# EAGLE board source_eagle (EAGLE 9.6.2)
REV: A
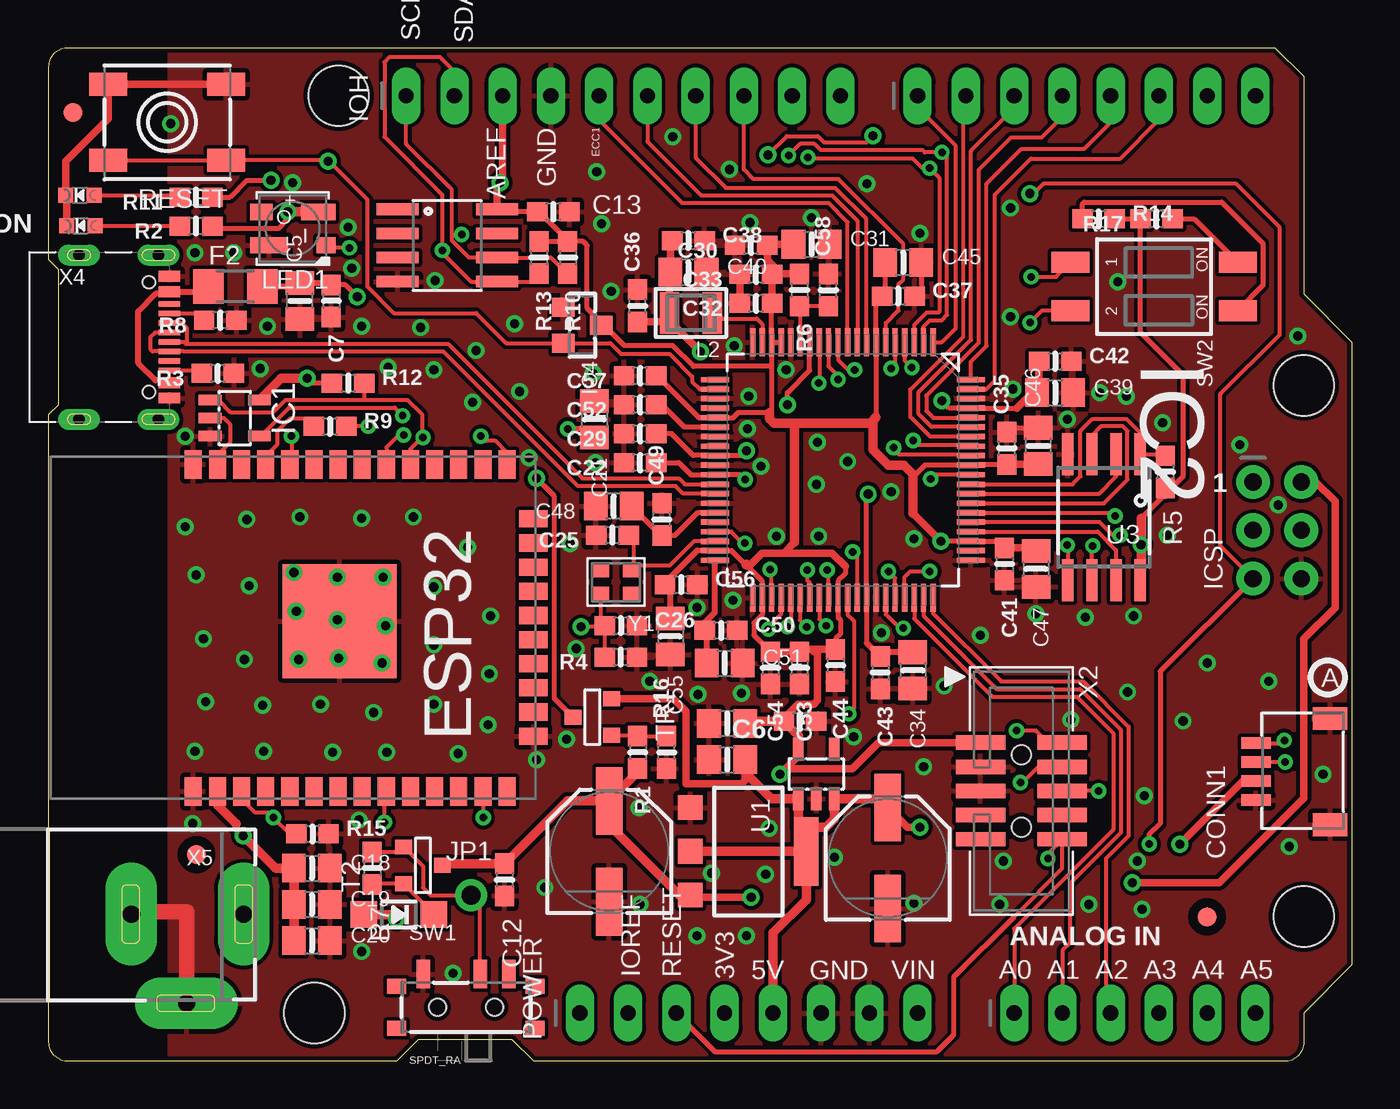
[diagram p0: board, top side]
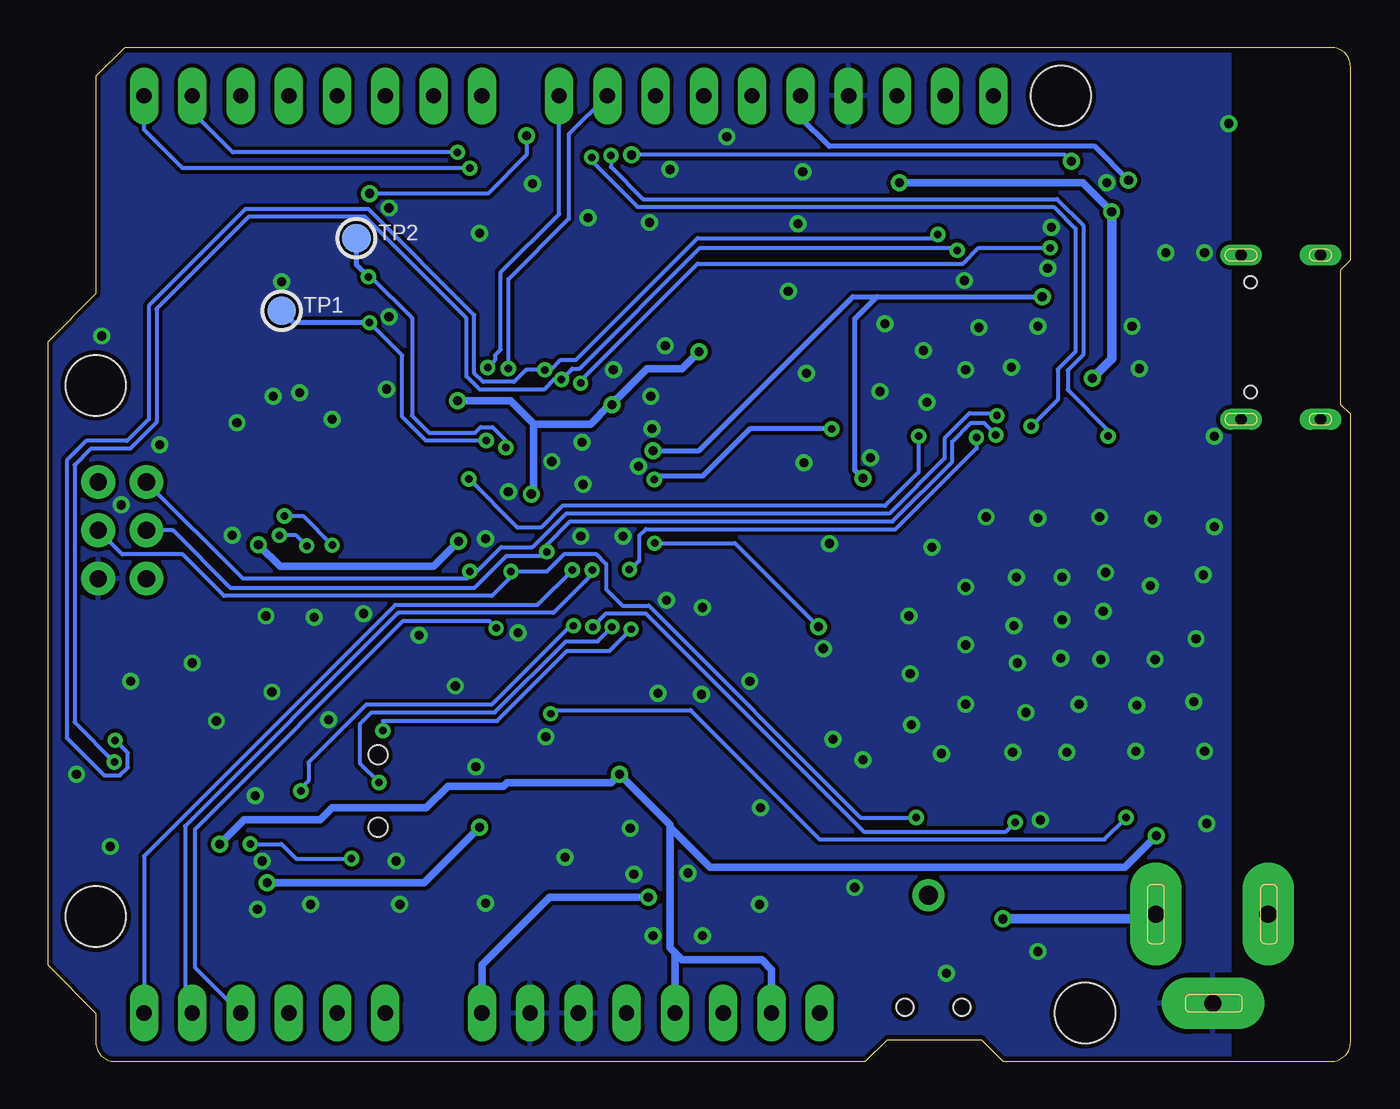
[diagram p1: board, bottom side, seen from below]

Size 68.58 x 53.34 mm. Coordinates in mm from the lower left corner, seen from the top.
Outline: 64.52,53.34 66.04,51.82 66.04,40.39 68.58,37.85 68.58,5.08 66.04,2.54 66.04,1 arc-90 65.04,0 25.53,0 24.38,1.14 19.43,1.14 18.29,0 1,0 arc-90 0,1 0,34.04 0.51,34.54 0.51,41.66 0,42.16 0,52.34 arc-90 1,53.34 64.52,53.34
Copper layers (1*16): Top 0.035mm / dielectric 1.5mm / Bottom 0.035mm
Design rules "adafruit *": minimum track width 8mil, minimum drill 15.5mil, track to track 8mil, track to pad 8mil, pad to pad 8mil, via to via 8mil, smd to smd 8mil, copper to edge 10mil, drill to drill 8mil, minimum pad ring 10mil, minimum via ring 8mil, stop-mask expansion 2mil, vias tented up to drill 20mil, thermal gap 10mil
Net classes: 3 HIGHPOWER: width 0.254 mm, drill 0.483 mm; 4 LOWPOWER: width 0.254 mm
Holes 3.17 mm at 66.04,35.56 66.04,7.62 15.24,50.8 13.97,2.54

## Footprints (pad centres in the part's own frame; a part is rotated, then mirrored left to right if it is on the bottom)
1X06_OVALWAVE = drill 0.8 pad 1.5 long: 1 -6.35,0; 2 -3.81,0; 3 -1.27,0; 4 1.27,0; 5 3.81,0; 6 6.35,0
0805-NO = smd 1.24 x 1.5: 1 -0.95,0; 2 0.95,0
0603-NO = smd 1.075 x 1: 1 -0.85,0; 2 0.85,0
JST_SH4 = smd 0.6 x 1.55: 1 -1.5,2.006; 2 -0.5,2.006; 3 0.5,2.006; 4 1.5,2.006 | smd 1.2 x 1.8: MT1 -2.8,-1.894; MT2 2.8,-1.894
SOD-123 = smd 1.4 x 1.4: A 1.85,0; C -1.85,0
SOIC8 = smd 0.61 x 2.21: 1 -1.905,-2.616; 2 -0.635,-2.616; 3 0.635,-2.616; 4 1.905,-2.616; 5 1.905,2.616; 6 0.635,2.616; 7 -0.635,2.616; 8 -1.905,2.616
R1206 = smd 1.6 x 1.803: 1 -1.422,0; 2 1.422,0
FIDUCIAL_1MM = smd 1 x 1: 1 0,0
SOT23-5L = smd 0.55 x 1.2: 1 -0.95,-1.3; 2 0,-1.3; 3 0.95,-1.3; 4 0.95,1.3; 5 -0.95,1.3
QFP50P1400X1400X160-80N = smd 1.473 x 0.279: 1 -6.731,4.75; 2 -6.731,4.242; 3 -6.731,3.759; 4 -6.731,3.251; 5 -6.731,2.743; 6 -6.731,2.261; 7 -6.731,1.753; 8 -6.731,1.245; 9 -6.731,0.762; 10 -6.731,0.254; 11 -6.731,-0.254; 12 -6.731,-0.762; 13 -6.731,-1.245; 14 -6.731,-1.753; 15 -6.731,-2.261; 16 -6.731,-2.743; 17 -6.731,-3.251; 18 -6.731,-3.759; 19 -6.731,-4.242; 20 -6.731,-4.75; 41 6.731,-4.75; 42 6.731,-4.242; 43 6.731,-3.759; 44 6.731,-3.251; 45 6.731,-2.743; 46 6.731,-2.261; 47 6.731,-1.753; 48 6.731,-1.245; 49 6.731,-0.762; 50 6.731,-0.254; 51 6.731,0.254; 52 6.731,0.762; 53 6.731,1.245; 54 6.731,1.753; 55 6.731,2.261; 56 6.731,2.743; 57 6.731,3.251; 58 6.731,3.759; 59 6.731,4.242; 60 6.731,4.75 | smd 0.279 x 1.473: 21 -4.75,-6.731; 22 -4.242,-6.731; 23 -3.759,-6.731; 24 -3.251,-6.731; 25 -2.743,-6.731; 26 -2.261,-6.731; 27 -1.753,-6.731; 28 -1.245,-6.731; 29 -0.762,-6.731; 30 -0.254,-6.731; 31 0.254,-6.731; 32 0.762,-6.731; 33 1.245,-6.731; 34 1.753,-6.731; 35 2.261,-6.731; 36 2.743,-6.731; 37 3.251,-6.731; 38 3.759,-6.731; 39 4.242,-6.731; 40 4.75,-6.731; 61 4.75,6.731; 62 4.242,6.731; 63 3.759,6.731; 64 3.251,6.731; 65 2.743,6.731; 66 2.261,6.731; 67 1.753,6.731; 68 1.245,6.731; 69 0.762,6.731; 70 0.254,6.731; 71 -0.254,6.731; 72 -0.762,6.731; 73 -1.245,6.731; 74 -1.753,6.731; 75 -2.261,6.731; 76 -2.743,6.731; 77 -3.251,6.731; 78 -3.759,6.731; 79 -4.242,6.731; 80 -4.75,6.731
SOT23-WIDE = smd 1 x 1.2: 1 -0.95,-1; 2 0.95,-1; 3 0,1
2X03_ROUND_70MIL = drill 0.9 pad 1.778: 1 -2.54,-1.27; 2 -2.54,1.27; 3 0,-1.27; 4 0,1.27; 5 2.54,-1.27; 6 2.54,1.27
1X10_OVALWAVE = drill 0.8 pad 1.5 long: 1 -11.43,0; 2 -8.89,0; 3 -6.35,0; 4 -3.81,0; 5 -1.27,0; 6 1.27,0; 7 3.81,0; 8 6.35,0; 9 8.89,0; 10 11.43,0
1X08_OVALWAVE = drill 0.8 pad 1.5 long: 1 -8.89,0; 2 -6.35,0; 3 -3.81,0; 4 -1.27,0; 5 1.27,0; 6 3.81,0; 7 6.35,0; 8 8.89,0
1X01_ROUND = drill 1 pad 1.676: 1 0,0
CHIPLED_0603_NOOUTLINE = smd 0.8 x 0.8: A 0,-0.75; C 0,0.75
INDUCTOR_1007 = smd 1.016 x 2.2: P$1 -1.127,0; P$2 1.127,0
LED3535_FULLPADS = smd 1 x 0.85: 1 -1.75,0.875 | smd 1.8 x 0.85: 2 -1.35,-0.875 | smd 1.2 x 0.85: 3 1.65,-0.875 | smd 2 x 0.85: 4 1.25,0.875
PANASONIC_D = smd 3.556 x 1.4: + 2.654,0; - -2.654,0
EVQ-Q2_SMALLER = smd 2 x 1.2: A -3.1,-2; A' 3.1,-2; B -3.1,2; B' 3.1,2
SPDT_SMT_SSSS811101 = smd 0.7 x 1.5: A -2.25,1.242; B 0.75,1.242; C 2.25,1.242 | smd 1 x 0.8: SUP1 -3.65,0.592; SUP2 -3.65,-1.608; SUP3 3.65,0.592; SUP4 3.65,-1.608 | hole 0.9: -1.5,-0.508; 1.5,-0.508
DIPSWITCH_2PIN = smd 1.1 x 2: 1OFF -1.27,-4.4; 1ON -1.27,4.4; 2OFF 1.27,-4.4; 2ON 1.27,4.4
SOT-23 = smd 0.787 x 0.889: 1 0.025,-1.016; 2 -0.94,1.016; 3 0.991,1.016
TESTPOINT_ROUND_1.5MM = smd 1.5 x 1.5: P$1 0,0
SOT223-R = smd 1.3 x 1.3: 1 -2.3,-3.05; 2 0,-3.05; 3 2.3,-3.05 | smd 3.6 x 1.3: 4 0,3.05
SOT23-DBV = smd 0.55 x 1.2: 1 -0.95,-1.3; 2 0,-1.3; 3 0.95,-1.3; 4 0.95,1.3; 5 -0.95,1.3
SOIC8_208MIL = smd 0.6 x 2.2: 1 -1.905,-3.315; 2 -0.635,-3.315; 3 0.635,-3.315; 4 1.905,-3.315; 5 1.905,3.315; 6 0.635,3.315; 7 -0.635,3.315; 8 -1.905,3.315
2X05_1.27MM_BOX_POSTS = smd 0.76 x 2.6: 1 -2.54,-2.15; 2 -2.54,2.15; 3 -1.27,-2.15; 4 -1.27,2.15; 5 0,-2.15; 6 0,2.15; 7 1.27,-2.15; 8 1.27,2.15; 9 2.54,-2.15; 10 2.54,2.15 | hole 1: -1.905,0; 1.905,0
USB_C_CUSB31-CFM2AX-01-X = smd 0.575 x 1.15: A1B12 -3.2,2.275; A4B9 -2.4,2.275; B1A12 3.2,2.275; B4A9 2.4,2.275 | smd 0.275 x 1.15: A5 -1.25,2.275; A6 -0.25,2.275; A7 0.25,2.275; A8 1.25,2.275; B5 1.75,2.275; B6 0.75,2.275; B7 -0.75,2.275; B8 -1.75,2.275 | drill 0.6 pad 1 long: M1 -4.32,1.7; M2 4.32,1.7; M3 -4.32,-2.48; M4 4.32,-2.48 | hole 0.65: 2.89,1.2; -2.89,1.2
DCJACK_2MM_PTH = drill 0.9 pad 2.7 long: GND -2.9,2.54; GNDBREAK 0,-2.16; PWR 3,2.54
WROOM32 = smd 0.9 x 1.5: 1 -9.064,-8.6; 2 -7.794,-8.6; 3 -6.524,-8.6; 4 -5.254,-8.6; 5 -3.984,-8.6; 6 -2.714,-8.6; 7 -1.444,-8.6; 8 -0.174,-8.6; 9 1.096,-8.6; 10 2.366,-8.6; 11 3.636,-8.6; 12 4.906,-8.6; 13 6.176,-8.6; 14 7.446,-8.6; 25 7.446,8.6; 26 6.176,8.6; 27 4.906,8.6; 28 3.636,8.6; 29 2.366,8.6; 30 1.096,8.6; 31 -0.174,8.6; 32 -1.444,8.6; 33 -2.714,8.6; 34 -3.984,8.6; 35 -5.254,8.6; 36 -6.524,8.6; 37 -7.794,8.6; 38 -9.064,8.6 | smd 1.5 x 0.9: 15 8.836,-5.7; 16 8.836,-4.43; 17 8.836,-3.16; 18 8.836,-1.89; 19 8.836,-0.62; 20 8.836,0.65; 21 8.836,1.92; 22 8.836,3.19; 23 8.836,4.46; 24 8.836,5.73 | smd 6 x 6: P$1 -1.364,0.34
CRYSTAL_2.5X2 = smd 0.9 x 0.75: 1 -0.825,-0.625; 2 0.825,-0.625; 3 0.825,0.625; 4 -0.825,0.625

## Placement (x,y rotation side)
AD  1x6F  [1X06_OVALWAVE]  57.15,2.54 0 top
C2  10uF  [0805-NO]  35.69,15.88 0 top
C3  10uF  [0805-NO]  35.69,17.78 0 top
C5  10uF  [0805-NO]  13.21,40.01 90 top
C6  0.1uF  [0603-NO]  39.53,17.88 180 top
C7  0.1uF  [0603-NO]  14.86,40.01 270 top
C12  0.1uF  [0603-NO]  23.98,9.55 270 top
C13  0.1uF  [0603-NO]  26.54,44.7 0 top
C18  10uF  [0805-NO]  13.84,10.16 0 top
C19  10uF  [0805-NO]  13.84,8.26 0 top
C20  10uF  [0805-NO]  13.84,6.35 0 top
C21  10uF  [0805-NO]  28.7,33.78 270 top
C22  0.1uF  [0603-NO]  31.11,31.5 180 top
C25  16pF  [0603-NO]  29.65,27.69 180 top
C26  16pF  [0603-NO]  30.1,22.92 0 top
C29  1uF  [0603-NO]  31.11,33.02 180 top
C30  1uF  [0603-NO]  36.96,42.93 180 top
C31  10uF  [0805-NO]  40.13,42.99 0 top
C32  0.1uF  [0603-NO]  37.21,39.88 180 top
C33  0.22uF  [0603-NO]  37.21,41.4 180 top
C34  22uF  [0805-NO]  45.47,20.57 270 top
C35  0.1uF  [0603-NO]  50.42,32.26 90 top
C36  1uF  [0603-NO]  30.99,39.75 90 top
C37  0.1uF  [0603-NO]  44.7,40.26 0 top
C38  0.22uF  [0603-NO]  33.66,43.18 0 top
C39  10uF  [0805-NO]  52.96,35.18 0 top
C40  10uF  [0805-NO]  33.66,41.53 0 top
C41  0.1uF  [0603-NO]  50.29,26.16 270 top
C42  1uF  [0603-NO]  52.96,36.83 0 top
C43  0.1uF  [0603-NO]  43.75,20.45 270 top
C44  1uF  [0603-NO]  41.4,20.83 270 top
C45  10uF  [0805-NO]  44.96,42.04 0 top
C46  10uF  [0805-NO]  52.07,32.38 90 top
C47  10uF  [0805-NO]  51.94,25.91 270 top
C48  10uF  [0805-NO]  29.72,29.21 180 top
C49  0.22uF  [0603-NO]  32.26,28.51 90 top
C50  0.22uF  [0603-NO]  35.37,22.67 0 top
C51  10uF  [0805-NO]  35.56,20.95 0 top
C52  0.22uF  [0603-NO]  31.11,34.54 180 top
C53  0.22uF  [0603-NO]  39.5,20.7 270 top
C54  1uF  [0603-NO]  37.97,20.7 270 top
C55  10uF  [0805-NO]  32.7,22.35 270 top
C56  0.22uF  [0603-NO]  33.27,25.08 0 top
C57  0.22uF  [0603-NO]  31.11,36.07 180 top
C58  0.22uF  [0603-NO]  41.02,40.58 90 top
CONN1  STEMMA_I2C_QT  [JST_SH4]  65.53,15.24 90 top
D1  MBR120  [SOD-123]  18.41,7.72 180 top
ECC1  ATECC108  [SOIC8]  20.95,42.93 270 top
F2  FUSE  [R1206]  9.8,40.77 0 top
FD1  FIDUCIAL_1MM  [FIDUCIAL_1MM]  1.27,49.91 0 top
FD2  FIDUCIAL_1MM  [FIDUCIAL_1MM]  60.95,7.6 0 top
FD3  FIDUCIAL_1MM  [FIDUCIAL_1MM]  7.77,10.88 0 top
IC1  74AHC1G125  [SOT23-5L]  9.78,33.85 270 top
IC2  IMX_RT1010  [QFP50P1400X1400X160-80N]  41.78,31.11 270 top
IC4  RESET_SUPERVISORAPX80X_SA  [SOT23-WIDE]  28.07,38.73 270 top
ICSP  2x3M  [2X03_ROUND_70MIL]  64.64,27.94 270 top
IOH  1x10F  [1X10_OVALWAVE]  30.23,50.8 0 top
IOL  1x8F  [1X08_OVALWAVE]  54.61,50.8 0 top
JP1  [1X01_ROUND]  22.23,8.74 0 top
L  RED  [CHIPLED_0603_NOOUTLINE]  1.63,45.57 90 top
L2  4.7uH  [INDUCTOR_1007]  33.78,39.37 180 top
LED1  WS2812B_3535FULL  [LED3535_FULLPADS]  12.83,43.81 180 top
ON  GREEN  [CHIPLED_0603_NOOUTLINE]  1.68,43.97 90 top
PC1  47uF/25V  [PANASONIC_D]  29.49,11.05 90 top
PC2  47uF/25V  [PANASONIC_D]  44.15,10.69 90 top
POWER  1x8F  [1X08_OVALWAVE]  36.83,2.54 0 top
R1  100K  [0603-NO]  30.99,16.26 270 top
R2  5.1K  [0603-NO]  7.75,43.94 180 top
R3  5.1K  [0603-NO]  8.89,36.2 180 top
R4  2.2M  [0603-NO]  30.1,21.27 180 top
R5  10K  [0603-NO]  58.75,31.01 270 top
R6  30K  [0603-NO]  39.5,40.58 270 top
R7  10K  [0603-NO]  17.02,10.16 270 top
R8  5.1K  [0603-NO]  9.02,38.99 180 top
R9  10K  [0603-NO]  14.8,33.4 0 top
R10  10K  [0603-NO]  27.3,42.29 270 top
R11  5.1K  [0603-NO]  7.75,45.47 180 top
R12  10K  [0603-NO]  15.75,35.69 0 top
R13  10K  [0603-NO]  25.78,42.29 270 top
R14  5.1K  [0603-NO]  55.24,44.32 0 top
R15  10K  [0603-NO]  13.87,11.96 0 top
R16  100K  [0603-NO]  32.51,16.26 90 top
R17  5.1K  [0603-NO]  58.29,44.32 180 top
RESET  6x6mm  [EVQ-Q2_SMALLER]  6.22,49.4 180 top
SW1  SPDT_RA  [SPDT_SMT_SSSS811101]  21.95,3.35 0 top
SW2  DIP2  [DIPSWITCH_2PIN]  58.17,40.77 270 top
T2  DMP3098L-7  [SOT-23]  19.68,10.29 90 top
TP1  [TESTPOINT_ROUND_1.5MM]  56.26,39.5 0 bottom
TP2  [TESTPOINT_ROUND_1.5MM]  52.32,43.31 0 bottom
TR1  DMP3098L-7  [SOT-23]  28.6,18.14 270 top
U1  NCP1117ST50T3G  [SOT223-R]  36.8,11.05 270 top
U2  AP2112K-3.3  [SOT23-DBV]  40.39,15.11 0 top
U3  W25Q64JV  [SOIC8_208MIL]  55.52,28.63 180 top
U$11  [PCBFEAT-REV-040]  67.31,20.19 0 top
U$12  [METROM7_RT1011AIR_BOT]  68.58,0 0 bottom
U$18  [METROM7_RT1011AIR_TOP]  0,0 0 top
X2  2x5 0.05" SWD  [2X05_1.27MM_BOX_POSTS]  51.18,14.22 270 top
X4  USB C  [USB_C_CUSB31-CFM2AX-01-X]  4.06,38.1 270 top
X5  2.1mm  [DCJACK_2MM_PTH]  7.24,5.21 0 top
X6  ESP32_WROOM32  [WROOM32]  16.66,22.81 0 top
Y1  24MHz 10pF  [CRYSTAL_2.5X2]  29.84,25.21 180 top

## Library data of the parts
AD ICSP IOH IOL POWER = microbuilder; FORCETHM: 1
C2 C3 C5-C7 C12 C13 C18-C22 C25 C26 C29-C58 D1 JP1 L2 LED1 R1-R17 TP1 TP2 U3 Y1 = microbuilder
CONN1 = adafruit_electromech; LCSC: C2845363
ECC1 = cryptotronix
F2 = adafruit
FD1-FD3 = microbuilder; BOM: EXCLUDE
IC1 = adafruit; ROT: 270
IC2 = adafruit_micro; ROT: 270
IC4 = adafruit_power; ROT: 270
L ON U1 = microbuilder; ROT: 270
PC1 PC2 = microbuilder; ROT: 180
RESET SW1 SW2 X2 = adafruit_electromech
T2 = zetex; OC_FARNELL: unknown; OC_NEWARK: unknown; ROT: 90
TR1 = Transistors; CASE: SOT23; MONTHLY_USAGE: _____; PART_NUMBER: PMV48XP; PRICE: _____; ROT: 90; SUPPLIER: _____; TYPE: Transistor
U2 = SmartPrj
U$11 = microbuilder; REV: A
U$12 U$18 = metro_silks
X4 = adafruit_electromech; LCSC: C165948
X5 = adafruit_electromech; FORCETHM: 1
X6 = adafruit_wireless

## Nets
3.3V [HIGHPOWER]: C3.2 C6.2 C13.1 C18.1 C19.1 C20.1 C30.1 C31.1 C32.1 C33.1 C35.1 C37.1 C41.1 C44.1 C45.1 C46.1 C47.1 C53.1 C54.1 C55.1 C56.1 C57.1 CONN1.2 ECC1.8 IC1.5 IC2.7 IC2.17 IC2.18 IC2.25 IC2.39 IC2.42 IC2.50 IC2.63 IC2.71 IC4.3 IOH.3 LED1.2 POWER.2 POWER.4 R2.1 R5.2 R6.1 R10.1 R12.1 R13.1 R14.2 R17.2 U2.5 U3.8 X2.1 X6.2
!RESET: IC2.22 IC4.2 ICSP.5 POWER.3 RESET.B RESET.B' X2.10
+5V [HIGHPOWER]: C2.2 ICSP.2 PC2.+ POWER.5 TR1.2 U1.2 U1.4 U2.1 U2.3
A0: AD.1 IC2.58
A1: AD.2 IC2.59
A2: AD.3 IC2.60
A3: AD.4 IC2.55
A4: AD.5 IC2.47
A5: AD.6 IC2.49
BOOT_MODE0: IC2.72 SW2.1OFF TP2.P$1
BOOT_MODE1: IC2.73 SW2.2OFF TP1.P$1
D2: IC2.79 IOL.6
D3: IC2.80 IOL.5
D4: IC2.76 IOL.4
D5: IC2.75 IOL.3
D6: IC2.74 IOL.2
D7: IC2.1 IOL.1
D8: IC2.4 IOH.10
D9: IC2.5 IOH.9
D10: IC2.6 IOH.8
D11: IC2.8 IOH.7
D12: IC2.9 IOH.6
D13: IC2.10 IOH.5 R11.1
D+: IC2.33 X4.A6 X4.B6
D-: IC2.32 X4.A7 X4.B7
DCDC: IC2.19 L2.P$1
ESP_BUSY: IC2.46 X6.9
ESP_CS: IC1.1 IC2.43 R12.2 X6.29
ESP_GPIO0: IC2.70 X6.25
ESP_MISO: IC1.2 X6.37
ESP_RESET: IC2.51 R15.1 X6.3
ESP_TX: R9.1 X6.35
FLASH_CS: IC2.69 R5.1 U3.1
FLASH_IO0: IC2.66 U3.5
FLASH_IO1: IC2.68 U3.2
FLASH_IO2: IC2.67 U3.3
FLASH_IO3: IC2.64 U3.7
FLASH_SCK: IC2.65 U3.6
GND: C2.1 C3.1 C5.1 C6.1 C7.2 C12.2 C13.2 C18.2 C19.2 C20.2 C21.1 C22.2 C25.2 C26.2 C29.2 C30.2 C31.2 C32.2 C33.2 C34.2 C35.2 C36.2 C37.2 C38.2 C39.2 C40.2 C41.2 C42.2 C43.2 C44.2 C45.2 C46.2 C47.2 C48.2 C49.2 C50.2 C51.2 C52.2 C53.2 C54.2 C55.2 C56.2 C57.2 C58.2 CONN1.1 CONN1.MT1 CONN1.MT2 ECC1.4 IC1.3 IC2.16 IC2.20 IC2.23 IC2.27 IC2.30 IC2.34 IC2.41 IC2.54 IC2.61 IC2.78 IC4.1 ICSP.6 IOH.4 L.C LED1.4 ON.C PC1.- PC2.- POWER.6 POWER.7 R3.1 R4.1 R8.1 R15.2 R16.1 RESET.A RESET.A' SW1.A U1.1 U2.2 U3.4 X2.3 X2.5 X4.A1B12 X4.B1A12 X5.GND X5.GNDBREAK X6.1 X6.15 X6.38 X6.P$1
MISO: IC1.4 IC2.57 ICSP.1
MOSI: IC2.56 ICSP.4 X6.13
N$1: L.A R11.2
N$2: ON.A R2.2
N$3: R14.1 SW2.2ON
N$4: R17.1 SW2.1ON
N$6: R8.2 X4.A5
N$8: R3.2 X4.B5
N$9: C26.1 IC2.37 R4.2 Y1.3
N$10: C25.1 IC2.38 Y1.1
N$11: R1.1 R16.2 TR1.3
N$15: D1.C R7.2 T2.2
NEOPIX: IC2.13 LED1.1
PSW: C58.1 IC2.15 R6.2
PWR_SWITCH: JP1.1 R7.1 SW1.B T2.3
PWRIN [HIGHPOWER]: D1.A X5.PWR
RXD: IC2.3 IOL.8 R9.2
SCK: IC2.52 ICSP.3 X6.30
SCL: CONN1.4 ECC1.6 IC2.11 IOH.1 R10.2
SDA: CONN1.3 ECC1.5 IC2.12 IOH.2 R13.2
SVCS_CAP [LOWPOWER]: C52.1 IC2.26
SWCLK: IC2.45 X2.4
SWDIO: IC2.44 X2.2
SWO: IC2.48 X2.6
TXD: IC2.2 IOL.7 X6.34
USB_CAP [LOWPOWER]: C21.2 C22.1 IC2.31
VBUS [HIGHPOWER]: C5.2 C7.1 C29.1 F2.2 IC2.29 TR1.1
VBUS_UNFUSE [HIGHPOWER]: F2.1 X4.A4B9 X4.B4A9
VDD_SOC_IN [HIGHPOWER]: C34.1 C36.1 C38.1 C39.1 C40.1 C42.1 C43.1 IC2.14 IC2.53 IC2.77 L2.P$2
VDDA_1P1_CAP [LOWPOWER]: C50.1 C51.1 IC2.40
VDDA_2P5_CAP [LOWPOWER]: C48.1 C49.1 IC2.35
VIN [HIGHPOWER]: C12.1 PC1.+ POWER.8 R1.2 T2.1 U1.3

## Tracks (layer width: path | path; a pad name or v marks a point on that pad's centre or on a via)
3.3V  (via drill 0.48)
  Top 0.254: C35.1 48.55,31.41 IC2.71 46.1,31.37 45.47,30.73 45.47,29.97 | 52.04,31.41 C46.1 | 49.95,27.36 IC2.63 v46.94,27.36 | IC2.18 IC2.17 | IC2.18 38.02,39.84 | 38.02,36.56 38.02,34.21 37.92,34.11 36.26,34.11 36.01,33.86 IC2.25 34.21,33.86 32,36.07 C57.1 | 43.54,33.88 IC2.7 43.54,40.23 43.56,40.26 C37.1 44.01,40.41 C45.1 | C44.1 41.4,22.23 41.66,22.48 41.66,23.24 41.53,23.37 IC2.50 41.53,25.27 41.91,25.65 41.91,26.04 | C54.1 37.1,22.43 37.1,23.05 37.54,23.5 IC2.42 37.54,25.26 36.67,26.13 | 36.64,26.16 35.93,26.87 IC2.39 34.11,26.87 | ECC1.8 23.7,44.7 C13.1 25.78,44.7 27.32,43.16 R10.1 | 38.02,36.56 33.92,36.56 32.83,37.66 30.29,37.66 29.21,38.73 | 29.21,38.73 28.32,39.62 28.32,42.93 28.11,43.14 R10.1 | IC2.18 38.02,36.56 | 57.48,28.57 58.75,29.84 59.69,30.79 59.69,36.11 57.44,38.35 R17.2 R14.2 | v12.57,44.7 12.57,44.32 12.06,43.81 8.72,43.81 R2.1 | R12.1 13.84,35.69 v13.59,35.94 | R13.1 R10.1 | IC4.3 29.21,38.73
  Top 0.305: 34.11,26.87 32.42,25.18 C56.1 32.7,24.8 C55.1
  Top 0.406: C35.1 52.04,31.41 | 49.95,27.36 C41.1 51.79,27.01 C47.1 | 38.02,39.84 C32.1 C33.1 38.06,41.91 | R6.1 38.54,41.43 38.06,41.91 | 38.06,41.91 37.81,42.16 C30.1 37.87,42.99 C31.1 | v46.94,27.36 45.47,28.83 | C54.1 C53.1 39.62,21.68 40.13,21.68 | 40.13,21.68 C44.1 | 36.64,26.16 36.67,26.19 36.7,26.16 36.83,26.04 37.53,26.73 38.67,26.73 | 38.67,26.73 41.21,26.73 41.91,26.04 | 40.13,21.68 40.26,21.55 40.45,21.55 40.45,18.99 40.25,18.79 39.42,18.79 38.68,18.05 C6.2 | U2.5 39.44,16.07 v38.48,15.11 38.77,15.41 42.29,15.41 43.65,16.76 X2.1 | v10.22,11.87 9.84,12.26 9.84,12.51 | ECC1.8 23.57,46.05 v23.75,46.23 23.88,46.35 IOH.3 | 39.24,27.3 38.67,26.73 | CONN1.2 62.82,14.74 v59.51,11.43
  Top 0.508: R5.2 58.75,29.84 | 57.48,28.57 v57.48,27.18 57.48,26.11 57.43,26.06 U3.8 | 43.36,33.58 39.24,33.58 | 39.24,33.58 38.15,33.58 37.92,33.81 37.92,34.11 | 43.54,33.88 43.36,33.71 43.36,33.58 | 45.47,28.83 45.47,29.97 45.47,30.89 45,31.36 44.18,31.36 43.36,32.18 43.36,33.58 | 36.67,26.13 36.7,26.16 | X6.2 8.87,13.48 9.84,12.51 | v10.22,11.87 11.94,10.16 C18.1 C19.1 C20.1 | C3.2 36.74,17.88 C6.2 39.44,17.13 U2.5 | LED1.2 12.59,44.69 v12.57,44.7 | v13.59,35.94 12.22,35.94 IC1.5 | 39.24,33.58 39.24,27.3
  Bottom 0.406: 35.81,12.32 33.72,10.22 11.87,10.22 v10.22,11.87 | 35.81,12.32 35.81,12.45 v38.48,15.11 38.92,14.67 44.39,14.67 44.58,14.48 47.5,14.48 48.64,13.34 53.59,13.34 54.23,12.7 58.24,12.7 v59.51,11.43 | 35.81,12.32 35.81,5.97 35.56,5.71 | 35.56,5.71 POWER.4 | 35.56,5.71 35.18,5.33 30.99,5.33 30.48,4.83 POWER.2 | v23.75,46.23 14.1,46.23 v12.57,44.7 | v57.48,27.18 56.34,26.04 48.26,26.04 v46.94,27.36
  Bottom 0.508: v12.57,44.7 12.57,36.96 v13.59,35.94
!RESET  (via drill 0.39, 0.48)
  Top 0.203: 14.7,47.4 RESET.B RESET.B' | 14.7,47.4 16.76,45.34 16.76,40.76 18.15,39.37 22.48,39.37 24.06,37.78 IC4.2 29.55,37.78 30.11,37.22 32.65,37.22 33.85,36.03 33.85,35.76 34.25,35.36 IC2.22 | 50.8,7.62 53.33,10.15 X2.10 52.58,10.93 v52.58,10.67 | 14.7,47.4 v14.7,47.36 | ICSP.5 61.66,27.11 61.66,35.12 64.77,38.23 64.77,43.88 62.48,46.16 52.32,46.16 51.72,45.56 | v37.85,47.69 38.83,48.67 40.47,48.67 40.79,48.35 43.03,48.35 v43.37,48.69
  Top 0.254: ICSP.5 58.48,20.51 58.48,12.51 57.91,11.94 v57.91,11.43 | POWER.3 35.05,0.51 46.74,0.51 47.62,1.4 47.62,4.45 50.8,7.62 | 51.72,45.56 v51.63,45.66
  Bottom 0.203: v57.91,11.43 56.26,11.43 55.5,10.67 v52.58,10.67 | v14.7,47.36 15.03,47.69 v37.85,47.69 | v51.63,45.66 45.4,45.66 43.37,47.69 v43.37,48.69
+5V  (via drill 0.48)
  Top 0.406: TR1.2 32.87,19.07 33.53,18.41 33.53,14.61 36.45,14.61 36.64,14.79 C2.2 | ICSP.2 66.67,30.48 67.69,29.46 67.69,23.88 66.04,22.23 66.04,13.84 61.59,9.4 v57.02,9.4 | v45.85,12.32 45.17,12.32 PC2.+
  Top 0.508: C2.2 36.64,15.21 38.04,13.81 U2.1 39.44,12.32 39.82,12.32 | 39.82,12.32 39.82,11.09 U1.4 | 39.82,12.32 40.89,12.32 41.34,12.76 U2.3 43.68,13.81 PC2.+ | U1.2 U1.4 | POWER.5 38.1,6.75 39.85,8.51 U1.4
  Bottom 0.406: v57.02,9.4 48.77,9.4 v45.85,12.32
A0
  Top 0.203: IC2.58 45.54,23.29 49.66,19.18 54.1,19.18 56.01,17.27 56.01,12.19 50.8,6.99 AD.1
A1
  Top 0.203: IC2.59 46.02,23.44 49.89,19.58 54.27,19.58 56.41,17.44 56.41,12.02 53.72,9.33 53.72,6.22 53.34,5.84 AD.2
A2
  Top 0.203: AD.3 55.63,2.79 55.63,10.66 56.82,11.86 56.82,17.61 54.44,19.99 50.12,19.99 46.53,23.57 IC2.60
A3  (via drill 0.39)
  Top 0.203: IC2.55 44.04,23.52 44.87,22.7 v44.96,22.79
  Bottom 0.203: v44.96,22.79 45.34,23.17 49.85,23.17 60.83,12.19 60.83,4.95 AD.4
A4  (via drill 0.39)
  Top 0.203: IC2.47 40.03,25.18 39.92,25.3 v39.92,25.85
  Bottom 0.203: v39.92,25.85 39.92,25.64 41.96,23.6 50.12,23.6 61.34,12.38 61.34,2.92 AD.5
A5  (via drill 0.39)
  Top 0.203: IC2.49 41.02,25.78 v40.96,25.85
  Bottom 0.203: v40.96,25.85 42.8,24 50.29,24 63.5,10.79 AD.6
BOOT_MODE0  (via drill 0.39)
  Top 0.203: IC2.72 48.48,31.91 44.73,31.91 44.46,32.18 v44.46,32.29 | SW2.1OFF 53,41.27 v51.69,41.27
  Bottom 0.203: v44.46,32.29 44.46,32.67 45.16,33.37 45.78,33.37 46.08,33.07 48.49,33.07 49.4,33.98 49.4,39.12 51.56,41.27 v51.69,41.27
  Bottom 0.254: v51.69,41.27 52.32,41.91 TP2.P$1
BOOT_MODE1  (via drill 0.39)
  Top 0.203: IC2.73 48.45,32.42 45.62,32.42 45.49,32.55 v45.49,32.66 | v51.63,38.86 52.27,39.5 SW2.2OFF
  Bottom 0.203: v45.49,32.66 48.66,32.66 49.91,33.91 49.91,37.14 v51.63,38.86
  Bottom 0.254: v51.63,38.86 55.63,38.86 TP1.P$1
D2
  Top 0.203: IC2.79 49.33,35.36 49.78,35.81 49.78,45.59 51.69,47.5 56.39,47.5 58.42,49.53 IOL.6
D3
  Top 0.203: IC2.80 48.51,36.8 49.35,37.63 49.35,46.17 51.18,48.01 54.48,48.01 55.88,49.4 IOL.5
D4
  Top 0.203: IC2.76 46.54,33.86 46.17,34.23 46.17,35.02 48.94,37.8 48.94,46.91 50.65,48.61 52.25,48.61 53.34,49.7 IOL.4
D5
  Top 0.203: IC2.75 46.45,33.38 45.76,34.06 45.76,35.19 48.53,37.96 48.53,47.9 50.8,50.16 IOL.3
D6
  Top 0.203: IC2.74 46.38,32.87 45.34,33.91 45.34,35.34 48.13,38.13 48.13,50.67 IOL.2
D7
  Top 0.203: IC2.1 46.99,37.85 47.72,38.58 47.72,48.16 45.59,50.29 45.59,50.67 IOL.1
D8  (via drill 0.39)
  Top 0.203: IC2.4 45.03,36.88 v45.41,36.5
  Bottom 0.203: v45.41,36.5 45.03,36.89 45.03,37.14 44.73,37.44 44.73,41.5 41.66,44.58 IOH.10
D9  (via drill 0.39)
  Top 0.203: IC2.5 44.53,36.65 v44.32,36.45
  Bottom 0.203: v44.32,36.45 44.32,41.15 41.15,44.32 41.15,48.77 IOH.9
D10
  Top 0.203: IC2.6 44.04,38.84 44.71,39.51 44.71,40.88 44.96,41.13 44.96,43.02 41.55,46.42 37.08,46.42 36.58,46.93 IOH.8
D11
  Top 0.203: IOH.7 34.04,47.55 35.62,45.96 41.38,45.96 42.99,44.35 42.99,37.88 IC2.8
D12
  Top 0.203: IOH.6 31.5,48.39 34.33,45.55 41.21,45.55 42.55,44.22 IC2.9
D13  (via drill 0.48)
  Top 0.203: IOH.5 28.96,49.53 33.34,45.15 41.04,45.15 42.04,44.15 IC2.10
  Top 0.254: R11.1 9.53,45.47 10.41,46.35 v11.68,46.35
  Bottom 0.254: v11.68,46.35 13.46,48.13 27.43,48.13 28.96,49.66 IOH.5
D+
  Top 0.203: IC2.33 33.38,29.87 32.98,30.27 27.84,30.27 20.77,37.34 7.11,37.34 7.1,37.35 X4.B6 5.45,37.35 5.33,37.47 5.33,38.1 5.58,38.34 X4.A6
D-
  Top 0.203: 7.24,37.74 7.21,37.74 7.1,37.85 X4.A7 | 7.24,37.74 21,37.74 28.07,30.67 33.15,30.67 33.47,30.35 IC2.32 | X4.B7 7,38.85 7.24,38.61 7.24,37.74
DCDC
  Top 0.203: IC2.19 37.54,38.79 37.25,39.07 35.44,39.07 35.15,39.37 L2.P$1
ESP_BUSY  (via drill 0.39)
  Top 0.203: IC2.46 39.52,23.22 v39.88,22.86 | v17.65,12.57 17.65,14.21 X6.9
  Bottom 0.203: v39.88,22.86 39.17,23.57 37.09,23.57 25.62,12.09 18.14,12.09 v17.65,12.57
ESP_CS  (via drill 0.39)
  Top 0.203: X6.29 19.03,32.22 19.5,32.69 19.55,32.69 v19.69,32.83 19.62,32.89 19.62,34.03 18.86,34.8 16.51,34.8 | 16.51,34.8 12.45,34.8 11.8,34.15 9.54,34.15 8.89,34.8 IC1.1 | R12.2 16.6,34.89 16.51,34.8 | IC2.43 38.02,25.81 v37.95,25.88
  Bottom 0.203: v37.95,25.88 37.89,25.88 37.45,26.33 37.45,27.64 37.08,28 23.94,28 19.69,32.25 v19.69,32.83
ESP_GPIO0  (via drill 0.39)
  Top 0.203: IC2.70 46.63,30.86 v46.4,30.64 | X6.25 24.11,32.03 23.5,32.64 22.99,32.64 v22.73,32.89
  Bottom 0.203: v22.73,32.89 22.73,30.99 24.5,29.22 41.47,29.22 42.62,28.08 43.84,28.08 v46.4,30.64
ESP_MISO
  Top 0.203: IC1.2 9.21,33.85 9.53,33.53 9.53,32.56 8.87,31.9 X6.37
ESP_RESET  (via drill 0.39)
  Top 0.203: R15.1 12.68,11.96 v11.81,12.83 11.56,13.08 10.86,13.08 10.14,13.8 X6.3 | IC2.51 42.04,23.5 42.35,23.18 42.35,18.54 v42.1,18.29
  Bottom 0.203: v42.1,18.29 41.91,18.48 34.73,18.48 27.94,11.68 12.95,11.68 v11.81,12.83
ESP_TX
  Top 0.203: X6.35 11.41,31.84 12.01,32.44 12.01,33.15 12.68,33.82 13.53,33.82 R9.1
FLASH_CS
  Top 0.203: IC2.69 53.86,30.35 54.28,30.77 54.28,33.17 54.92,33.81 56.7,33.81 57.43,33.08 U3.1 58.67,31.94 R5.1
FLASH_IO0  (via drill 0.39)
  Top 0.203: v56.11,28.7 55.98,28.82 56.04,28.82 56.01,28.85 IC2.66 | v53.59,27.16 53.62,27.13 U3.5
  Bottom 0.203: v56.11,28.7 55.13,28.7 v53.59,27.16
FLASH_IO1
  Top 0.203: IC2.68 55.27,29.87 56.16,30.76 U3.2
FLASH_IO2
  Top 0.203: IC2.67 55.52,29.36 56.76,30.6 56.76,33.17 56.53,33.4 55.37,33.4 54.89,32.92 U3.3
FLASH_IO3
  Top 0.203: IC2.64 55.19,27.86 56.16,26.9 U3.7
FLASH_SCK  (via drill 0.39)
  Top 0.203: U3.6 54.89,27.08 v54.94,27.12 | v56.38,27.68 56,27.68 55.3,28.37 IC2.65
  Bottom 0.203: v54.94,27.12 55.49,27.68 v56.38,27.68
GND  (via drill 0.48)
  Top 0.254: C35.2 50.65,33.34 C46.2 | C45.2 45.91,40.61 C37.2
  Top 0.406: C32.2 C33.2 | ON.C 0.93,45.52 L.C 0.88,47.36 3.12,49.6 RESET.A' RESET.A
  Top 0.813: X5.GND 4.47,7.87 7.24,7.87 X5.GNDBREAK
  other vias: 36.83,34.99 36.77,33.27 37.47,31.31 40.39,30.35 36,24.26 36.45,19.37 34.16,19.3 31.62,20 27.75,21.72 27.43,27.24 27.24,16.95 25.65,15.88 31.05,13.34 37.91,12.26 34.86,9.91 37.72,9.84 34.1,6.6 36.7,6.6 41.34,10.73 45.53,8.32 50.23,10.54 57.28,10.54 60.96,20.95 57.66,13.97 7.56,12.51 7.68,16.32 8.26,18.92 8.13,22.23 7.75,25.59 7.18,28.13 10.41,28.51 10.54,25.02 10.29,21.15 11.3,16.32 13.14,21.15 13.02,23.69 12.89,25.72 15.18,25.46 17.59,25.46 17.72,22.92 17.53,20.95 15.24,21.21 15.18,23.24 13.21,28.64 16.45,28.57 19.18,28.64 22.03,27.05 23.24,23.43 20.26,24.96 20.26,21.91 23.18,20.38 20.26,18.8 23.11,17.72 21.53,16.19 17.78,16.26 17.08,18.35 14.92,16.26 14.29,18.8 11.24,18.73 16.32,12.7 16.45,5.78 21.27,4.64 26.1,9.14 31.11,8.26 11.11,36.45 7.18,32.89 7.68,42.55 12.83,46.23 6.41,49.34 28.83,46.8 29.08,44.07 36.89,44.13 29.59,40.51 28.77,31.5 28.64,36.2 34.1,23.88 44.32,29.97 53.59,33.78 50.74,35.37 55.31,35.18 51.94,23.56 56.26,41.02 45.85,43.56 40.13,44.39 36.07,37.66 42.35,17.08 38.8,36.39 22.29,34.67 20.26,36.39 17.84,36.51 16.45,38.67 19.56,38.61 22.48,37.4 24.77,35.24 25.27,31.75 11.49,38.67 9.72,42.55 46.04,15.49 53.78,17.97 54.74,8.26 50.04,8.26 54.55,23.37 57.09,23.43 58.86,27.69 58.61,33.59 56.71,34.99 45.53,27.5 47.12,19.75 49.02,22.42 40.51,27.62 38.29,27.62 43.05,46.16 20.32,41.08 15.94,41.72 15.75,43.88 43.81,22.54 40.45,32.58 42.04,31.56 35.81,46.93 32.83,48.64 57.53,8 65.28,11.3 67.06,15.11 59.69,17.91 56.77,19.43 50.61,39.18 50.61,44.89 24.51,38.8 65.72,38.16 62.67,32.45 64.71,29.27 64.2,20
  pour Top: 6.35,0 6.35,53.34 68.58,53.34 68.58,0
  pour Bottom: 6.35,0 6.35,53.34 68.58,53.34 68.58,0
MISO  (via drill 0.39)
  Top 0.203: IC2.57 45.03,25.48 45.34,25.78 v46.35,25.78 | IC1.4 11.14,32.9 12.64,34.39 18.19,34.39 v18.61,33.97
  Bottom 0.203: ICSP.1 58.29,25.4 46.48,25.4 46.48,25.65 v46.35,25.78 45.97,25.78 44.7,27.05 43.05,27.05 41.29,28.82 24.28,28.82 21.37,31.72 21.37,32.78 20.05,34.1 18.74,34.1 v18.61,33.97
MOSI  (via drill 0.39)
  Top 0.203: IC2.56 44.53,25.43 v44.19,25.77 | X6.13 22.86,14.19 v22.86,12.83
  Bottom 0.203: ICSP.4 64.64,26.67 61.47,26.67 59.28,24.49 45.19,24.49 44.19,25.49 v44.19,25.77 42.3,25.77 41.4,26.67 39.69,26.67 39.18,26.16 39.18,24.83 38.32,23.97 36.92,23.97 25.78,12.83 v22.86,12.83
N$1
  Top 0.203: L.A 6.79,45.57 R11.2
N$2
  Top 0.203: ON.A 6.87,43.97 R2.2
N$3
  Top 0.254: R14.1 54.4,45.12 54.48,45.21 61.72,45.21 63.9,43.04 63.9,40.83 SW2.2ON
N$4
  Top 0.254: R17.1 60.28,44.32 SW2.1ON
N$6
  Top 0.203: X4.A5 7.81,39.35 R8.2
N$8
  Top 0.203: X4.B5 7.88,36.35 R3.2
N$9  (via drill 0.39, 0.48)
  Top 0.203: IC2.37 35.9,27.86 36.5,27.26 v36.63,27.26 | C26.1 29.19,22.86 v28,22.86 | C26.1 29.02,23.15 Y1.3 | C26.1 R4.2
  Bottom 0.203: v36.63,27.26 32.4,27.26 v28,22.86
N$10
  Top 0.203: C25.1 30.76,27.43 30.76,25.92 Y1.1 30.91,26.08 32.67,26.08 33.95,27.36 IC2.38
N$11
  Top 0.203: TR1.3 30.95,17.14 R1.1 R16.2
N$15
  Top 0.203: D1.C 20.27,7.75 T2.2 17.05,9.35 R7.2
NEOPIX  (via drill 0.39)
  Top 0.203: IC2.13 40.54,35.7 v40.52,35.68 | v15.8,42.8 14.72,42.8 LED1.1
  Bottom 0.203: v40.52,35.68 40.52,35.81 34.36,41.97 20.41,41.97 19.58,42.8 v15.8,42.8
PSW
  Top 0.203: IC2.15 39.52,39.7 R6.2 C58.1
PWR_SWITCH
  Top 0.203: R7.1 18.4,11.01 T2.3 19.68,10.26 19.68,9.14 20.09,8.74 JP1.1 22.7,8.27 SW1.B
PWRIN  (via drill 0.48)
  Top 0.508: v18.29,7.49 18.06,7.72 D1.A
  Bottom 0.508: v18.29,7.49 10.49,7.49 X5.PWR
RXD  (via drill 0.39)
  Top 0.203: IC2.3 45.54,38.75 46.19,39.4 46.82,39.4 46.86,39.44 46.86,46.48 v46.35,46.99 45.97,46.99 45.47,47.5 40.07,47.5 40.01,47.56 v39.94,47.56 | v16.81,33.42 16.79,33.4 R9.2
  Bottom 0.203: v46.35,46.99 61.47,46.99 63.5,49.02 IOL.8 | v39.94,47.56 39.94,47.37 37.53,44.96 15.62,44.96 14.48,43.81 14.48,37.34 15.41,36.4 15.41,34.82 v16.81,33.42
SCK  (via drill 0.39)
  Top 0.203: IC2.52 42.55,26.56 v42.3,26.81 | v18.67,32.96 18.41,32.96 17.76,32.3 X6.30
  Bottom 0.203: ICSP.3 61.98,27.94 58.93,24.89 46.12,24.89 44.42,26.6 42.5,26.6 v42.3,26.81 42.3,27.19 41.07,28.41 24.11,28.41 20.96,31.55 20.96,32.61 19.98,33.59 19.3,33.59 v18.67,32.96
SCL  (via drill 0.39)
  Top 0.203: IOH.1 18.8,48.26 21.21,45.85 21.21,43.43 | 21.21,43.43 21.21,43.18 22.1,42.29 ECC1.6 26.42,42.29 27.27,41.44 R10.2 | IC2.11 41.53,36.92 42.06,36.39 v42.41,36.39 | v21.72,43.5 21.65,43.43 21.21,43.43 | v65.02,16.89 64.87,16.74 CONN1.4
  Bottom 0.203: v21.72,43.5 21.91,43.31 34.36,43.31 40.76,36.9 41.57,36.9 42.08,36.39 v42.41,36.39 43.39,36.39 44.03,35.74 45.65,35.74 46.12,36.21 46.12,39.26 51.69,44.83 58.17,44.83 63.25,39.75 63.25,33.78 64.39,32.64 66.55,32.64 67.56,31.62 67.56,17.02 65.59,15.04 64.77,15.04 64.36,15.46 64.36,16.22 v65.02,16.89
SDA  (via drill 0.39)
  Top 0.203: IOH.2 21.34,52.07 20.57,52.83 17.91,52.83 17.65,52.58 17.65,48.64 20.7,45.59 v20.7,42.67 20.7,42.55 22.23,41.02 ECC1.5 25.36,41.02 R13.2 | IC2.12 41.02,36.58 41.53,36.07 v41.53,35.88 | v65.06,15.75 v65.05,15.74 CONN1.3
  Bottom 0.203: v20.7,42.67 20.83,42.8 34.23,42.8 40.58,36.45 40.96,36.45 v41.53,35.88 41.92,35.88 42.46,35.34 45.82,35.34 46.52,36.04 46.52,39.09 51.86,44.42 58,44.42 62.84,39.58 62.84,33.61 64.22,32.23 66.29,32.23 67.16,31.37 67.16,17.84 v65.06,15.75
SVCS_CAP
  Top 0.254: C52.1 32.26,34.54 33.43,33.38 IC2.26
SWCLK  (via drill 0.39)
  Top 0.203: v38.87,22.86 38.87,23.05 39.04,23.22 IC2.45 | X2.4 52.08,15.49 51.26,14.68 v51.13,14.68
  Bottom 0.203: v38.87,22.86 39.63,22.1 41.3,22.1 45.04,18.36 51.51,18.36 52.15,17.72 52.15,15.69 v51.13,14.68
SWDIO  (via drill 0.39)
  Top 0.203: IC2.44 38.53,23.53 37.87,22.86 v37.87,22.73 | X2.2 52.58,16.76 51.94,17.4 v50.93,17.4
  Bottom 0.203: v37.87,22.73 39.01,21.59 41.23,21.59 44.91,17.91 50.93,17.91 v50.93,17.4
SWO  (via drill 0.39)
  Top 0.203: IC2.48 40.54,23.27 v40.89,22.92 | v55.24,14.22 X2.6
  Bottom 0.203: v40.89,22.92 41.05,22.92 45.21,18.76 51.81,18.76 54.84,15.73 54.84,14.76 55.24,14.35 v55.24,14.22
TXD  (via drill 0.39)
  Top 0.203: IC2.2 46.02,38.66 46.35,38.99 46.99,38.99 47.27,39.27 47.27,47.56 v47,47.83 46.09,47.83 45.98,47.94 40.62,47.94 40.3,48.27 39.53,48.27 v38.92,47.66 | v12.76,32.89 12.76,31.62 12.58,31.44 12.6,31.41 X6.34
  Bottom 0.203: v47,47.83 58.83,47.83 60.96,49.95 IOL.7 | v38.92,47.66 38.92,47.06 37.23,45.36 15.45,45.36 14.07,43.98 14.07,37.17 14.89,36.35 14.89,35.34 12.76,33.21 v12.76,32.89
USB_CAP  (via drill 0.39)
  Top 0.254: C22.1 33.15,31.5 33.78,30.86 IC2.31 36.39,30.86 v36.64,30.61 | C21.2 28.26,33.27 v27.3,33.27
  Bottom 0.254: v27.3,33.27 31.61,33.27 34.1,30.79 36.46,30.79 v36.64,30.61
VBUS  (via drill 0.48)
  Top 0.254: C29.1 32.77,33.02 33.91,31.88 IC2.29 36.58,31.88 36.7,32 v36.7,32.13 | v16.23,40.23 15.6,40.85 C7.1 | TR1.1 26.61,19.09 26.61,29.72 v25.65,30.67
  Top 0.305: F2.2 13.02,40.77 C5.2 14.76,40.95 C7.1
  Bottom 0.254: v36.7,32.13 34.29,32.13 26.19,40.23 24.92,40.23 | 24.92,40.23 v16.23,40.23 | v25.65,30.67 26.1,31.11 26.1,39.05 24.92,40.23
VBUS_UNFUSE
  Top 0.305: F2.1 8.12,40.5 X4.A4B9 6.34,40.37 5.6,40.37 4.7,39.47 4.7,36.74 5.61,35.83 6.34,35.83 X4.B4A9
VDD_SOC_IN  (via drill 0.48)
  Top 0.254: 32.66,41.48 C40.1 | v38.86,34.54 38.86,35.18 40.03,36.35 IC2.14 | v46.99,34.75 47.37,34.37 IC2.77 50.94,34.37 | v43.12,29.84 43.03,29.76 IC2.53 43.03,22.02
  Top 0.305: C34.1 43.98,21.52 C43.1 43.03,22.02
  Top 0.406: 50.94,34.37 51.76,35.18 C39.1 52.11,35.28 C42.1 | L2.P$2 32.66,41.48 | C40.1 32.7,43.08 C38.1 | C36.1 32.19,38.9 L2.P$2 | L2.P$2 32.66,38.97 v34.29,37.34
  Bottom 0.406: v34.29,37.34 35.18,36.45 37.02,36.45 38.86,34.61 v38.86,34.54 38.99,34.54 40.01,33.53 42.98,33.53 | v46.99,34.75 44.2,34.75 42.98,33.53 | 42.98,33.53 42.99,33.52 42.99,29.97 v43.12,29.84
VDDA_1P1_CAP
  Top 0.305: IC2.40 35.05,23.62 34.52,23.09 C50.1 34.61,22.58 C51.1
VDDA_2P5_CAP
  Top 0.254: IC2.35 34.12,28.85 32.93,27.66 C49.1 32.22,27.66 C48.1
VIN  (via drill 0.48)
  Top 0.406: U1.3 33.87,8.64 v36.96,8.64
  Top 0.508: T2.1 20.79,10.4 C12.1 27.28,13.7 PC1.+ | R1.2 30.99,15.2 PC1.+ | U1.3 33.18,8.75 29.49,12.44 PC1.+
  Bottom 0.406: v36.96,8.64 42.16,8.64 45.72,5.08 POWER.8

## Text on the board
tPlace: ESP32
tNames: SCL | SDA | AREF | GND | 1 | ANALOG IN | IOREF | RESET | 3V3 | 5V | GND | VIN | A0 | A1 | A2 | A3 | A4 | A5
214bmp: D:/SmartProjects/Snc/a4_bn_logo2.bmp